# EAGLE board Hiking Log Rev B (EAGLE 9.3.0)
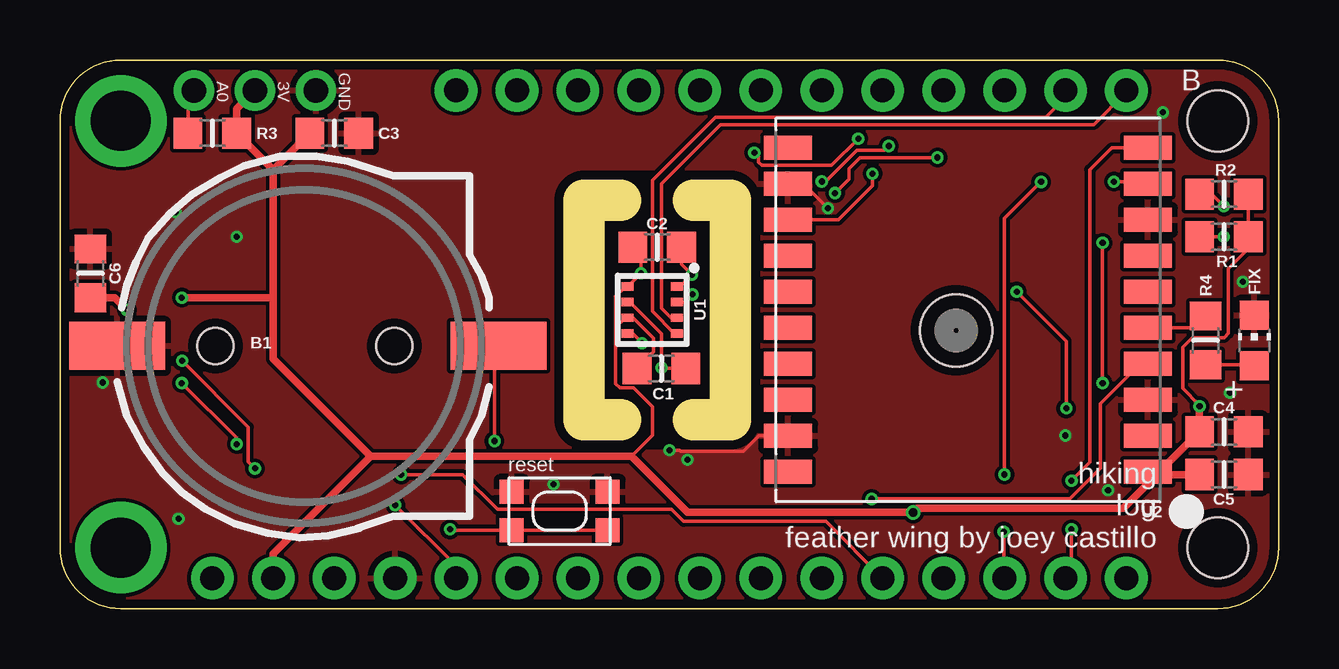
[diagram p0: board, top side]
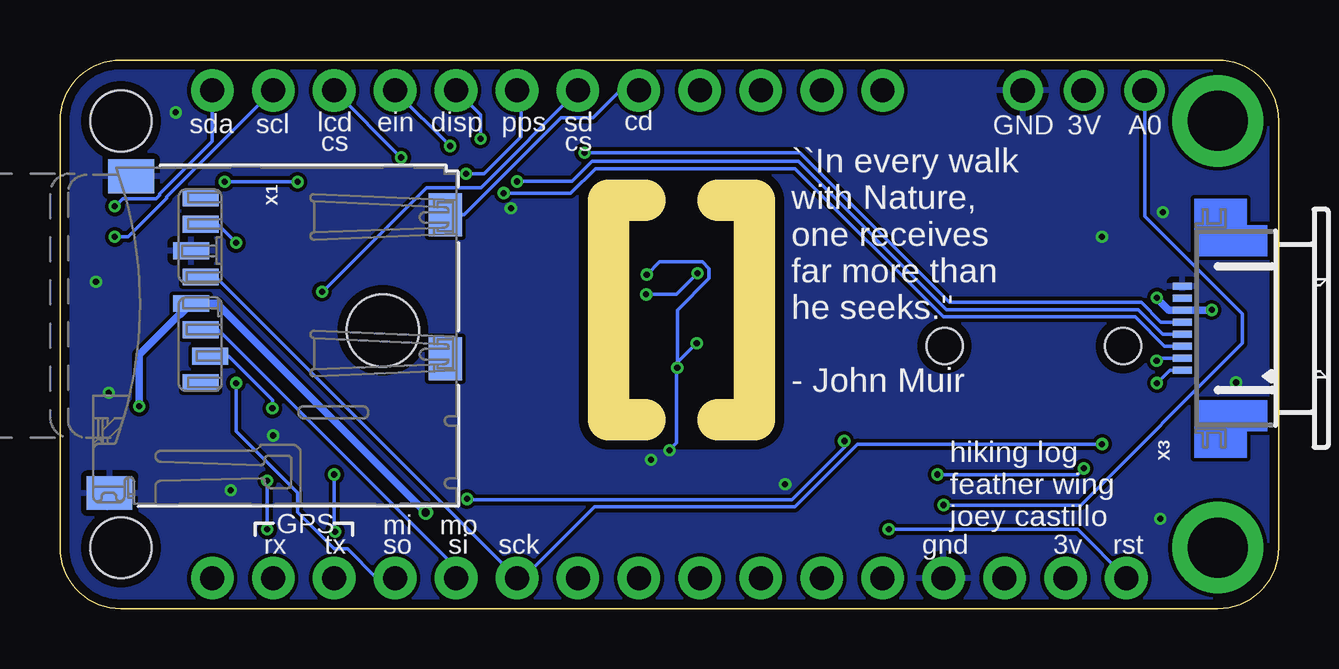
[diagram p1: board, bottom side, seen from below]

Size 50.8 x 22.86 mm. Coordinates in mm from the lower left corner, seen from the top.
Outline: 26.42,17.02 27.94,17.02 27.94,7.87 26.42,7.87
Outline: 23.37,7.87 21.84,7.87 21.84,17.02 23.37,17.02
Outline: 2.54,22.86 48.26,22.86 arc-90 50.8,20.32 50.8,2.54 arc-90 48.26,0 2.54,0 arc-90 0,2.54 0,20.32 arc-90 2.54,22.86
Copper layers (1*16): Top 0.035559375mm / dielectric 1.6mm / Bottom 0.035559375mm
Design rules "oshpark-2layer *": minimum track width 6mil, minimum drill 10mil, track to track 6mil, track to pad 6mil, pad to pad 6mil, via to via 6mil, smd to smd 6mil, copper to edge 15mil, drill to drill 6mil, minimum pad ring 5mil, minimum via ring 5mil, stop-mask expansion 2.5mil, vias tented up to drill 20mil, thermal gap 10mil
Net classes: 0 default: width 0.06 mm; 1 power: width 0.12 mm
Milling: 6 lines

## Footprints (pad centres in the part's own frame; a part is rotated, then mirrored left to right if it is on the bottom)
CR1220-2 = smd 4 x 2: + 8.29,0; - -7.6,0 | hole 1.5: 3.95,0; -3.5,0
_0805MP = smd 1.2 x 1.3: 1 -1.016,0; 2 1.016,0
CHIP-LED0805 = smd 1.2 x 1.2: A 0,-1.05; C 0,1.05
1X03-CLEANBIG = drill 1.016 pad 1.676: 1 -2.54,0; 2 0,0; 3 2.54,0
FEATHERWING = drill 1 pad 1.778: 1 6.35,1.27; 2 8.89,1.27; 3 11.43,1.27; 4 13.97,1.27; 5 16.51,1.27; 6 19.05,1.27; 7 21.59,1.27; 8 24.13,1.27; 9 26.67,1.27; 10 29.21,1.27; 11 31.75,1.27; 12 34.29,1.27; 13 36.83,1.27; 14 39.37,1.27; 15 41.91,1.27; 16 44.45,1.27; 17 44.45,21.59; 18 41.91,21.59; 19 39.37,21.59; 20 36.83,21.59; 21 34.29,21.59; 22 31.75,21.59; 23 29.21,21.59; 24 26.67,21.59; 25 24.13,21.59; 26 21.59,21.59; 27 19.05,21.59; 28 16.51,21.59 | drill 2.5 pad 3.81: P$1 2.54,20.32; P$2 2.54,2.54 | hole 2.54: 48.26,20.32; 48.26,2.54
KMR2 = smd 1 x 1: 1 2,0.8; 2 2,-0.8; 3 -2,0.8; 4 -2,-0.8
BME280_LGA = smd 0.5 x 0.35: P$1 1.025,0.975; P$2 1.025,0.325; P$3 1.025,-0.325; P$4 1.025,-0.975; P$5 -1.025,-0.975; P$6 -1.025,-0.325; P$7 -1.025,0.325; P$8 -1.025,0.975
FGPMMOPA6H = smd 2 x 1: P$1 -7.5,6.75; P$2 -7.5,5.25; P$3 -7.5,3.75; P$4 -7.5,2.25; P$5 -7.5,0.75; P$6 -7.5,-0.75; P$7 -7.5,-2.25; P$8 -7.5,-3.75; P$9 -7.5,-5.25; P$10 -7.5,-6.75; P$11 7.5,-6.75; P$12 7.5,-5.25; P$13 7.5,-3.75; P$14 7.5,-2.25; P$15 7.5,-0.75; P$16 7.5,0.75; P$17 7.5,2.25; P$18 7.5,3.75; P$19 7.5,5.25; P$20 7.5,6.75 | hole 3: 0.5,0.85
MICROSD = smd 0.7 x 1.5: 1 9,-10.64; 2 7.9,-10.24; 3 6.8,-10.64; 4 5.7,-11.04; 5 4.6,-10.64; 6 3.5,-11.04; 7 2.4,-10.64; 8 1.3,-10.64 | smd 1.8 x 1.4: CD1 2,-0.44; CD2 8,-0.44 | smd 1.4 x 1.9: MT1 0.4,-13.54; MT2 13.6,-14.44
52745-0890 = smd 0.3 x 0.8: 1 -1.75,2.5; 2 -1.25,2.5; 3 -0.75,2.5; 4 -0.25,2.5; 5 0.25,2.5; 6 0.75,2.5; 7 1.25,2.5; 8 1.75,2.5

## Placement (x,y rotation side)
B1  CR1220  [CR1220-2]  9.98,10.95 0 top
C1  0.1uF  [_0805MP]  25.07,10.01 0 top
C2  0.1uF  [_0805MP]  24.89,15.06 0 top
C3  0.1uF  [_0805MP]  11.43,19.81 0 top
C4  1uF  [_0805MP]  48.51,7.37 0 top
C5  0.01uF  [_0805MP]  48.51,5.59 0 top
C6  0.1uF  [_0805MP]  1.27,13.97 270 top
FIX  RED  [CHIP-LED0805]  49.78,11.18 0 top
JP1  [1X03-CLEANBIG]  8.13,21.59 180 top
MS1  FEATHERWING  [FEATHERWING]  0,0 0 top
R1  10K  [_0805MP]  48.51,15.49 0 top
R2  10K  [_0805MP]  48.51,17.27 0 top
R3  10K  [_0805MP]  6.35,19.81 0 top
R4  470-1K  [_0805MP]  47.75,11.18 270 top
SW1  SPST_TACT-KMR2  [KMR2]  20.83,4.06 0 top
U1  BME280  [BME280_LGA]  24.69,12.45 0 top
U2  [FGPMMOPA6H]  37.85,12.45 180 top
X1  MICROSD  [MICROSD]  34.29,18.41 270 bottom
X3  52745-0890  [52745-0890]  1.52,11.68 90 bottom

## Library data of the parts
B1 C1-C6 MS1 R1-R4 X1 = microbuilder
FIX JP1 SW1 U2 = adafruit
U1 = BME280ComponentLibrary; PROD_ID: IC-13090
X3 = con-molex; MF: MOLEX; MPN: 52745-0890; OC_FARNELL: unknown; OC_NEWARK: 92M6377

## Nets
1PPS: MS1.22 U2.P$13
3.3V [power]: C1.1 C2.1 C3.1 C4.1 C5.1 C6.2 JP1.2 MS1.2 R1.2 R2.2 R3.2 U1.P$2 U1.P$6 U1.P$8 U2.P$1 X1.4 X3.6
CD: MS1.24 X1.CD1
DISP: MS1.21 X3.5
EXTCOMIN: MS1.20 X3.4
FIX: R4.1 U2.P$5
GND [power]: B1.- C1.2 C2.2 C3.2 C4.2 C5.2 C6.1 FIX.C JP1.1 MS1.4 SW1.1 SW1.3 U1.P$1 U1.P$5 U1.P$7 U2.P$3 U2.P$8 U2.P$12 U2.P$19 X1.6 X1.MT1 X1.MT2 X3.8
GPIOA0: JP1.3 MS1.5 R3.1
GPSRX: MS1.15 U2.P$10
GPSTX: MS1.14 U2.P$9
LCDCS: MS1.19 X3.3
MISO: MS1.13 X1.7
MOSI: MS1.12 X1.3 X3.2
N$2: FIX.A R4.2
RST: MS1.1 SW1.2 SW1.4
SCK: MS1.11 X1.5 X3.1
SCL: MS1.18 R1.1 U1.P$4
SDA: MS1.17 R2.1 U1.P$3
SDCS: MS1.23 X1.2
VBACKUP: B1.+ U2.P$4

## Tracks (layer width: path | path; a pad name or v marks a point on that pad's centre or on a via)
1PPS  (via drill 0.25)
  Top 0.152: U2.P$13 32.45,16.2 33.87,17.62 v33.87,18.12
  Bottom 0.152: MS1.22 31.58,21.42 31.58,19.67 33.13,18.12 v33.87,18.12
3.3V  (via drill 0.25, 0.35)
  Top 0.152: v26.36,13.09 26.36,13.07 26.07,12.77 U1.P$2 | 23.82,6.35 24.69,7.22 24.69,8.42 23.91,9.2 23.34,9.2 23.16,9.37 23.16,11.72 | 49.53,14.99 48.71,14.16 48.71,11.47 48.53,11.29 47.2,11.29 46.8,10.89 46.8,9.18 47.5,8.48 | 23.16,11.72 23.16,13.02 23.57,13.42 U1.P$8 v24.21,13.97 v24.22,13.97 24.22,14.72 C2.1 | 23.16,11.72 23.57,12.12 U1.P$6 23.89,12.12 24.74,11.27 24.74,10.69 C1.1 | R2.2 R1.2
  Top 0.305: 8.89,12.95 8.89,10.41 12.95,6.35 | 8.89,12.95 8.89,18.29 | C3.1 8.89,18.29 | 49.53,14.99 R1.2 | 8.89,18.29 R3.2 7.37,20.83 JP1.2 | 12.95,6.35 23.82,6.35 26.16,4.01 v35.56,4.01 35.74,4.19 44.32,4.19 45.72,5.59 | 12.95,6.35 8.89,2.29 MS1.2 | v5.08,12.95 8.89,12.95 | C6.2 2.29,12.95 v2.79,12.45 | 45.72,5.59 45.83,5.7 | U2.P$1 45.83,5.7 | 45.83,5.7 C4.1 | C5.1 45.72,5.59 | 47.75,7.62 C4.1 | C4.1 v47.5,8.43 47.5,8.48
  Bottom 0.152: v26.36,13.09 25.1,13.09 v24.22,13.97
  Bottom 0.305: v35.56,4.01 44.26,12.71 X1.4 45.77,12.27 45.81,12.27 47.5,10.58 v47.5,8.43 | v2.79,12.45 2.81,12.43 X3.6 4.04,12.43 4.57,12.43 v5.08,12.94 v5.08,12.95
CD
  Bottom 0.152: MS1.24 27.43,21.59 28.57,20.45 29.92,20.45 33.95,16.41 X1.CD1
DISP  (via drill 0.25)
  Top 0.152: v28.94,19 29.12,18.82 29.12,18.6 29.25,18.47 32.16,18.47 v33.27,19.58
  Bottom 0.152: X3.5 4.03,11.94 4.91,11.94 5.73,12.76 13.72,12.76 19.95,19 v28.94,19 | v33.27,19.58 33.27,20.57 MS1.21
EXTCOMIN  (via drill 0.25)
  Top 0.152: v34.54,19.28 34.37,19.1 33.23,19.1 31.93,17.8 v31.75,17.8
  Bottom 0.152: X3.4 4.83,11.43 5.86,12.46 13.84,12.46 20.03,18.64 28.61,18.64 29.46,17.8 v31.75,17.8 | v34.54,19.28 36.83,21.57 MS1.20
FIX
  Top 0.152: U2.P$5 47.26,11.7 R4.1
GND  (via drill 0.25)
  Top 0.152: U1.P$1 25.84,13.42 v26.34,13.92 25.91,14.35 C2.2 | C1.2 25.09,10.01 v25.07,10.03 25.07,11.46 23.76,12.77 U1.P$7 | U2.P$19 29.13,7.2 28.49,6.55 25.87,6.55 25.82,6.6 v25.4,6.6 | U2.P$12 30.99,17.7 v32.01,16.68 | U1.P$5 23.87,11.47 24.26,11.08 v24.26,11.06
  Bottom 0.152: v26.34,13.92 25.81,14.45 24.02,14.45 23.74,14.17 23.74,13.77 25.07,12.44 v25.07,10.03 | v25.07,10.03 25.09,10.01 25.09,6.91 v25.4,6.6 | v24.26,11.06 24.26,11.07 25.07,10.26 v25.07,10.03
  other vias: 4.94,3.75 20.57,5.18 26.16,6.2 43.69,4.93 49.3,13.61 7.37,15.49 48.77,8.99 45.97,20.68 41.91,7.21 4.83,16.51 1.78,9.42
  pour Top: 49.78,23.11 50.8,22.1 51.31,21.59 51.31,1.27 49.78,-0.25 48.01,-0.25 1.52,-0.25 -0.51,1.78 -0.51,21.84 0.76,23.11 1.02,23.11
  pour Bottom: 49.78,23.11 51.56,21.34 51.56,1.52 49.78,-0.25 1.52,-0.25 -0.51,1.78 -0.51,21.59 1.02,23.11
GPIOA0  (via drill 0.25)
  Top 0.152: R3.1 5.33,21.34 JP1.3 | v13.97,4.32 16.51,1.78 MS1.5
  Bottom 0.152: v13.97,4.32 8.26,4.32 1.52,11.05 1.52,12.29 5.59,16.36 JP1.3
GPSRX  (via drill 0.25)
  Top 0.152: MS1.15 42.16,1.52 v42.16,3.3 | U2.P$10 43.83,19.2 42.93,18.29 42.93,6.1 v42.16,5.33
  Bottom 0.152: v42.16,5.33 v42.16,3.3
GPSTX  (via drill 0.25)
  Top 0.152: v40.89,17.78 39.37,16.26 v39.37,5.59 | v43.93,17.79 45.25,17.79 U2.P$9 | v39.34,3.21 39.34,1.3 MS1.14 | v39.37,5.59
  Bottom 0.152: v40.89,17.78 40.91,17.79 v43.93,17.79 | v39.34,3.21 39.37,3.24 v39.37,5.59
LCDCS  (via drill 0.25)
  Top 0.152: v32.3,17.32 32.88,17.89 32.88,18.32 33.35,18.8 v36.58,18.8
  Bottom 0.152: X3.3 4.76,10.93 5.98,12.15 13.97,12.15 20.15,18.34 28.49,18.34 29.51,17.32 v32.3,17.32 | v36.58,18.8 MS1.19
MISO  (via drill 0.25)
  Top 0.152: v43.46,9.4 v43.46,15.24
  Bottom 0.152: MS1.13 37.59,1.27 38.81,2.49 39.37,2.49 40.89,4.01 40.89,4.83 43.46,7.39 v43.46,9.4 | v43.46,15.24 44.23,16.02 X1.7
MOSI  (via drill 0.25)
  Top 0.152: MS1.12 31.93,3.63 26,3.63 25.5,4.13 18.23,4.13 16.78,5.59 v14.22,5.59 | v8.13,5.84 7.85,6.12 7.85,7.57 v5.09,10.32
  Bottom 0.152: MS1.12 34.29,1.7 44.21,11.62 X1.3 | v14.22,5.59 8.38,5.59 v8.13,5.84 | X3.2 4.98,10.43 v5.09,10.32
N$2
  Top 0.152: R4.2 49.75,10.16 FIX.A
NC
  cutout Bottom: 21.69,6.71 21.69,18.19 27.94,18.19 27.94,6.71
  cutout Top: 21.84,6.71 21.84,18.19 28.09,18.19 28.09,6.71
RST  (via drill 0.25)
  Top 0.152: SW1.2 SW1.4 16.29,3.26 v16.26,3.3
  Bottom 0.152: v16.26,3.3 8.38,3.3 MS1.1
SCK  (via drill 0.25)
  Top 0.152: v7.37,6.86 7.37,7.11 v5.08,9.4
  Bottom 0.152: X1.5 44.3,13.81 MS1.11 31.5,1.27 28.52,4.24 20.17,4.24 17.55,6.86 v7.37,6.86 | v5.08,9.4 4.54,9.93 X3.1
SCL  (via drill 0.25)
  Top 0.152: MS1.18 41.91,21.28 41.1,20.47 27.33,20.47 24.7,17.85 24.7,12.38 25.62,11.46 U1.P$4 | v48.51,15.49 R1.1
  Bottom 0.152: v48.51,15.49 47.95,15.49 46.35,17.09 46.35,17.15 MS1.18
SDA  (via drill 0.25)
  Top 0.152: MS1.17 44.45,21.53 43.08,20.17 27.53,20.17 25.08,17.71 25.08,12.51 25.47,12.12 U1.P$3 | v48.51,16.76 48.01,17.27 R2.1
  Bottom 0.152: MS1.17 44.45,19.48 46.65,17.28 46.65,17.22 46.78,17.09 48.19,17.09 v48.51,16.76
SDCS  (via drill 0.25)
  Top 0.152: v41.94,8.35 41.94,11.14 v39.88,13.21
  Bottom 0.152: MS1.23 33.26,17.54 35.52,17.54 39.86,13.21 v39.88,13.21 | v41.94,8.35 41.94,8.69 43.77,10.52 X1.2
VBACKUP  (via drill 0.25)
  Top 0.152: B1.+ 18.11,10.79 v18.11,6.99 | U2.P$4 45.02,10.2 43.35,8.53 43.35,5.84 42.08,4.57 v33.83,4.57 | v33.83,4.57
  Bottom 0.152: v18.11,6.99 18.11,6.73 20.3,4.55 33.81,4.55 v33.83,4.57

## Text on the board
tPlace: A0 | 3V | GND | B | reset | hiking / log / feather wing by joey castillo
bPlace: A0 | 3V | GND | sd / cs | pps | disp | ein | lcd / cs | cd | scl | sda | ``In every walk / with Nature, / one receives / far more than / he seeks.'' / / - John Muir | hiking log / feather wing / joey castillo | GPS | rst | 3v | gnd | sck | mo / si | mi / so | tx | rx